# EAGLE board nano3 (EAGLE 7.1.0)
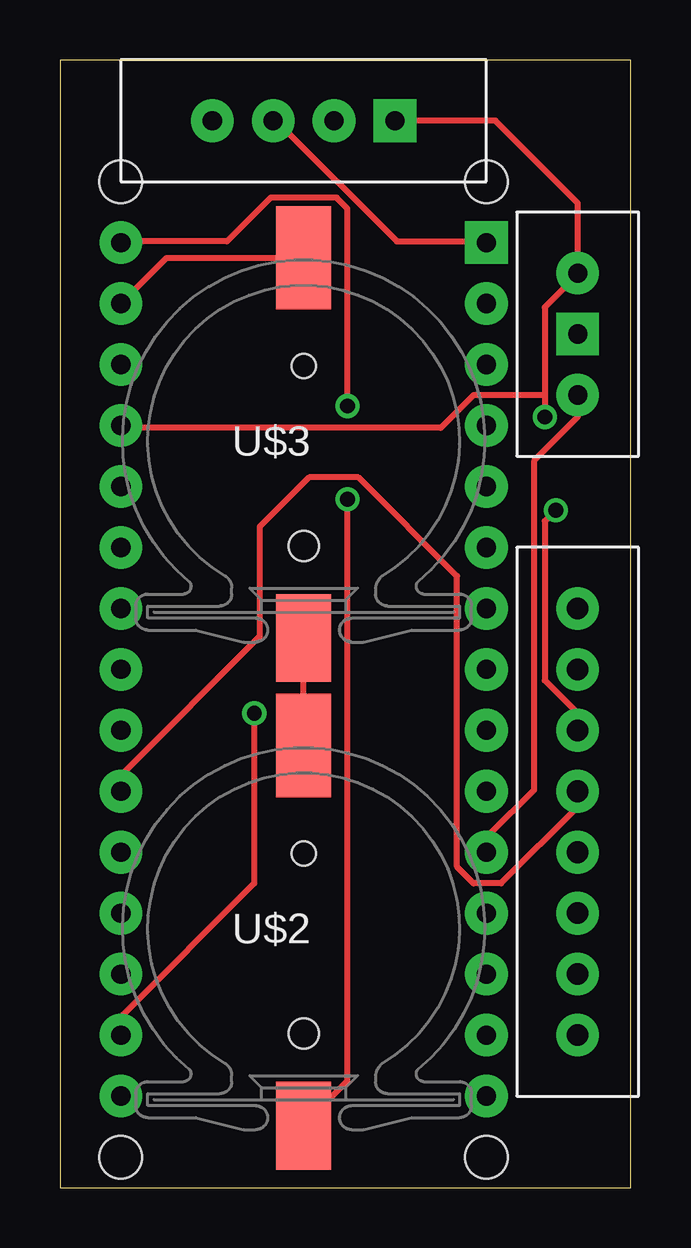
[diagram p0: board, top side]
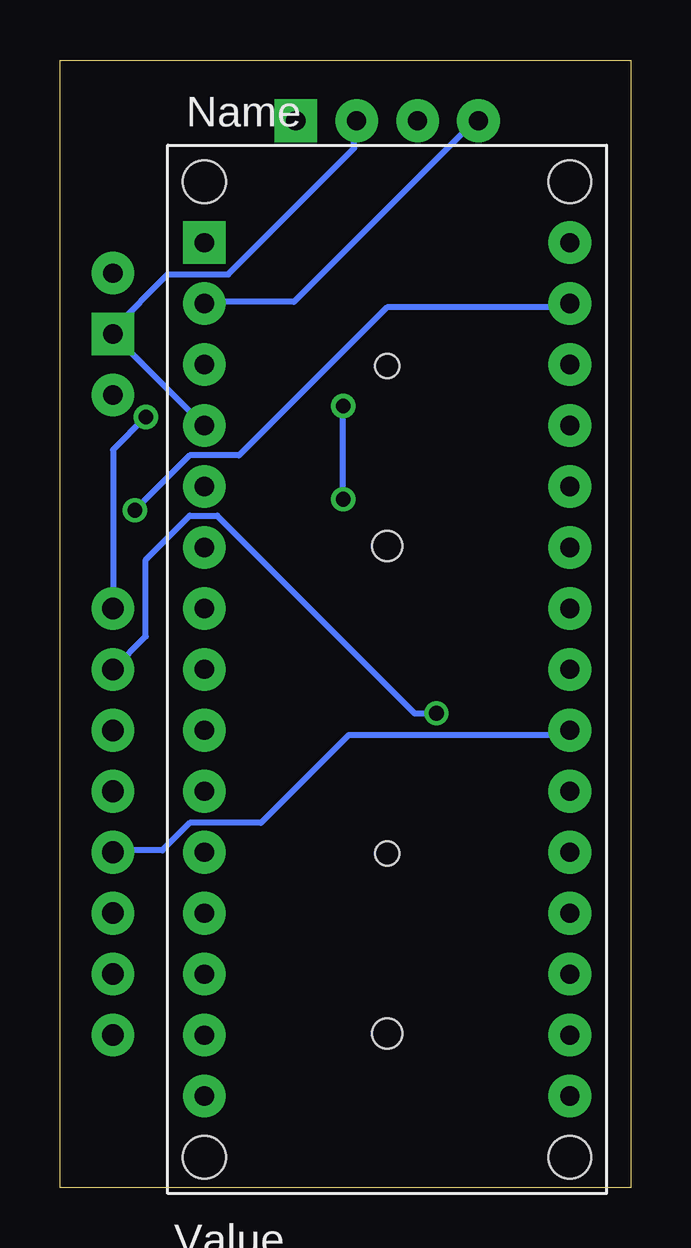
[diagram p1: board, bottom side, seen from below]

Size 23.8 x 46.98 mm. Coordinates in mm from the lower left corner, seen from the top.
Outline: 0,0 23.8,0 23.8,46.98 0,46.98 0,0
Copper layers (1*16): Top 0.035mm / dielectric 1.5mm / Bottom 0.035mm
Design rules "default": minimum track width 10mil, minimum drill 24mil, track to track 8mil, track to pad 8mil, pad to pad 8mil, via to via 8mil, smd to smd 8mil, copper to edge 40mil, drill to drill 8mil, minimum pad ring 10mil, minimum via ring 8mil, stop-mask expansion 4mil, vias tented up to drill 0mil, thermal gap 10mil

## Footprints (pad centres in the part's own frame; a part is rotated, then mirrored left to right if it is on the bottom)
PDIP-32 = drill 0.8 pad 1.778: 3V3 15.24,-35.56; +5V 15.24,-10.16; A0 15.24,-12.7; A1 15.24,-15.24; A2 15.24,-17.78; A3 15.24,-20.32; A4 15.24,-22.86; A5 15.24,-25.4; A6 15.24,-27.94; A7 15.24,-30.48; AREF 15.24,-33.02; D0/RX 0,-5.08; D2 0,-12.7; D3 0,-15.24; D4 0,-17.78; D5 0,-20.32; D6 0,-22.86; D7 0,-25.4; D8 0,-27.94; D9 0,-30.48; D10 0,-33.02; D11 0,-35.56; D12 0,-38.1; D13 15.24,-38.1; GND 0,-10.16; GND1 15.24,-5.08; RESET 0,-7.62; RESET1 15.24,-7.62; VIN 15.24,-2.54 | drill 0.8 pad 1.778 square: D1/TX 0,-2.54 | hole 1.778: 0,0; 0,-40.64; 15.24,-40.64; 15.24,0
HARWIN-CR1220 = smd 2.3 x 4.3: NEG 0,8.26 | smd 2.3 x 3.66: POS 0,-7.58 | hole 1: 0,3.75 | hole 1.25: 0,-3.75
GY85 = drill 0.9 pad 1.778: 3.3V 0,6.35; A_INT 0,-6.35; G_INT 0,-8.89; GND 0,3.81; M_DRDY 0,-3.81; SCL 0,1.27; SDA 0,-1.27; VCC_IN 0,8.89
HC06 = drill 0.8 pad 1.778: GND 0,-2.54; RXD 0,2.54; TXD 0,0 | drill 0.8 pad 1.778 square: VCC 0,-5.08
KEY_SMALL = drill 0.8 pad 1.778: DAT 0,-2.54; VCC 0,2.54 | drill 0.8 pad 1.778 square: GND 0,0

## Placement (x,y rotation side)
U$1  ARDUINONANO  [PDIP-32]  17.78,41.91 0 bottom
U$2  CR1220-HOLDER  [HARWIN-CR1220]  10.16,10.16 0 top
U$3  CR1220-HOLDER  [HARWIN-CR1220]  10.16,30.48 0 top
U$4  GY85  [GY85]  21.59,15.24 0 top
U$5  HC06  [HC06]  8.89,44.45 90 top
U$6  KEY_SMALL  [KEY_SMALL]  21.59,35.56 0 top

## Library data of the parts
U$1 = jet-lib
U$2 U$3 = battery-holder
U$4-U$6 = RMQLIFE

## Nets
N$1: U$1.+5V U$4.VCC_IN U$5.VCC U$6.VCC
N$2: U$1.VIN U$2.POS
N$3: U$1.GND1 U$3.NEG U$4.GND
N$4: U$1.3V3 U$4.3.3V
N$5: U$1.GND U$5.GND U$6.GND
N$6: U$1.D8 U$6.DAT
N$7: U$2.NEG U$3.POS
N$8: U$1.D1/TX U$5.TXD
N$9: U$1.D0/RX U$5.RXD
N$11: U$1.A5 U$4.SCL
N$12: U$1.A4 U$4.SDA

## Tracks (layer width: path | path; a pad name or v marks a point on that pad's centre or on a via)
N$1  (via drill 0.61)
  Top 0.254: 20.22,33.02 20.22,36.68 21.59,38.05 U$6.VCC 21.59,41.02 18.16,44.45 U$5.VCC | 20.22,33.02 v20.22,32.11 | 20.22,33.02 17.25,33.02 15.88,31.65 2.62,31.65 U$1.+5V
  Bottom 0.254: U$4.VCC_IN 21.59,30.73 v20.22,32.11
N$2  (via drill 0.61)
  Top 0.254: v11.99,32.56 11.99,40.79 11.53,41.25 8.79,41.25 6.96,39.42 2.62,39.42 U$1.VIN | v11.99,28.68 11.99,4.45 10.16,2.62 U$2.POS
  Bottom 0.254: v11.99,28.68 v11.99,32.56
N$3  (via drill 0.61)
  Top 0.254: U$4.GND 21.59,19.76 20.22,21.13 20.22,27.76 v20.68,28.22 | U$1.GND1 4.45,38.73 U$3.NEG
  Bottom 0.254: v20.68,28.22 18.39,30.5 16.33,30.5 10.16,36.68 2.62,36.68 U$1.GND1
N$4  (via drill 0.61)
  Top 0.254: v8.1,19.76 8.1,12.68 2.62,7.19 2.62,6.5 U$1.3V3
  Bottom 0.254: v8.1,19.76 9.02,19.76 17.25,27.99 18.39,27.99 20.22,26.16 20.22,22.96 U$4.3.3V
N$5
  Bottom 0.254: U$5.GND 11.53,44.45 11.53,43.31 16.79,38.05 19.3,38.05 21.59,35.76 U$6.GND 21.59,35.53 17.93,31.88 U$1.GND
N$6
  Top 0.254: U$6.DAT 21.59,32.11 19.76,30.28 19.76,16.56 17.93,14.73 17.93,14.05 U$1.D8
N$7
  Top 0.254: U$2.NEG U$3.POS
N$8
  Top 0.254: U$1.D1/TX 17.7,39.42 14.05,39.42 9.02,44.45 U$5.TXD
N$9
  Bottom 0.254: U$1.D0/RX 17.7,36.91 14.05,36.91 6.5,44.45 U$5.RXD
N$11
  Top 0.254: U$4.SCL 21.59,15.88 18.39,12.68 17.25,12.68 16.56,13.36 16.56,25.48 12.45,29.59 10.39,29.59 8.33,27.53 8.33,22.96 2.62,17.25 2.62,16.56 U$1.A5
N$12
  Bottom 0.254: U$4.SDA 21.59,14.05 19.53,14.05 18.39,15.19 15.42,15.19 11.76,18.85 2.62,18.85 U$1.A4